# Altium PCB FPGA_Board.PcbDoc (part 3 of 10)
Units mm, origin at the board's own origin, x right, y up, seen from the top; angles counter-clockwise.
Board outline 103.63 x 86.08 mm, 2 copper layers (Top Layer, Bottom Layer); 109 components, 200 nets, 667 pads, 237 vias.
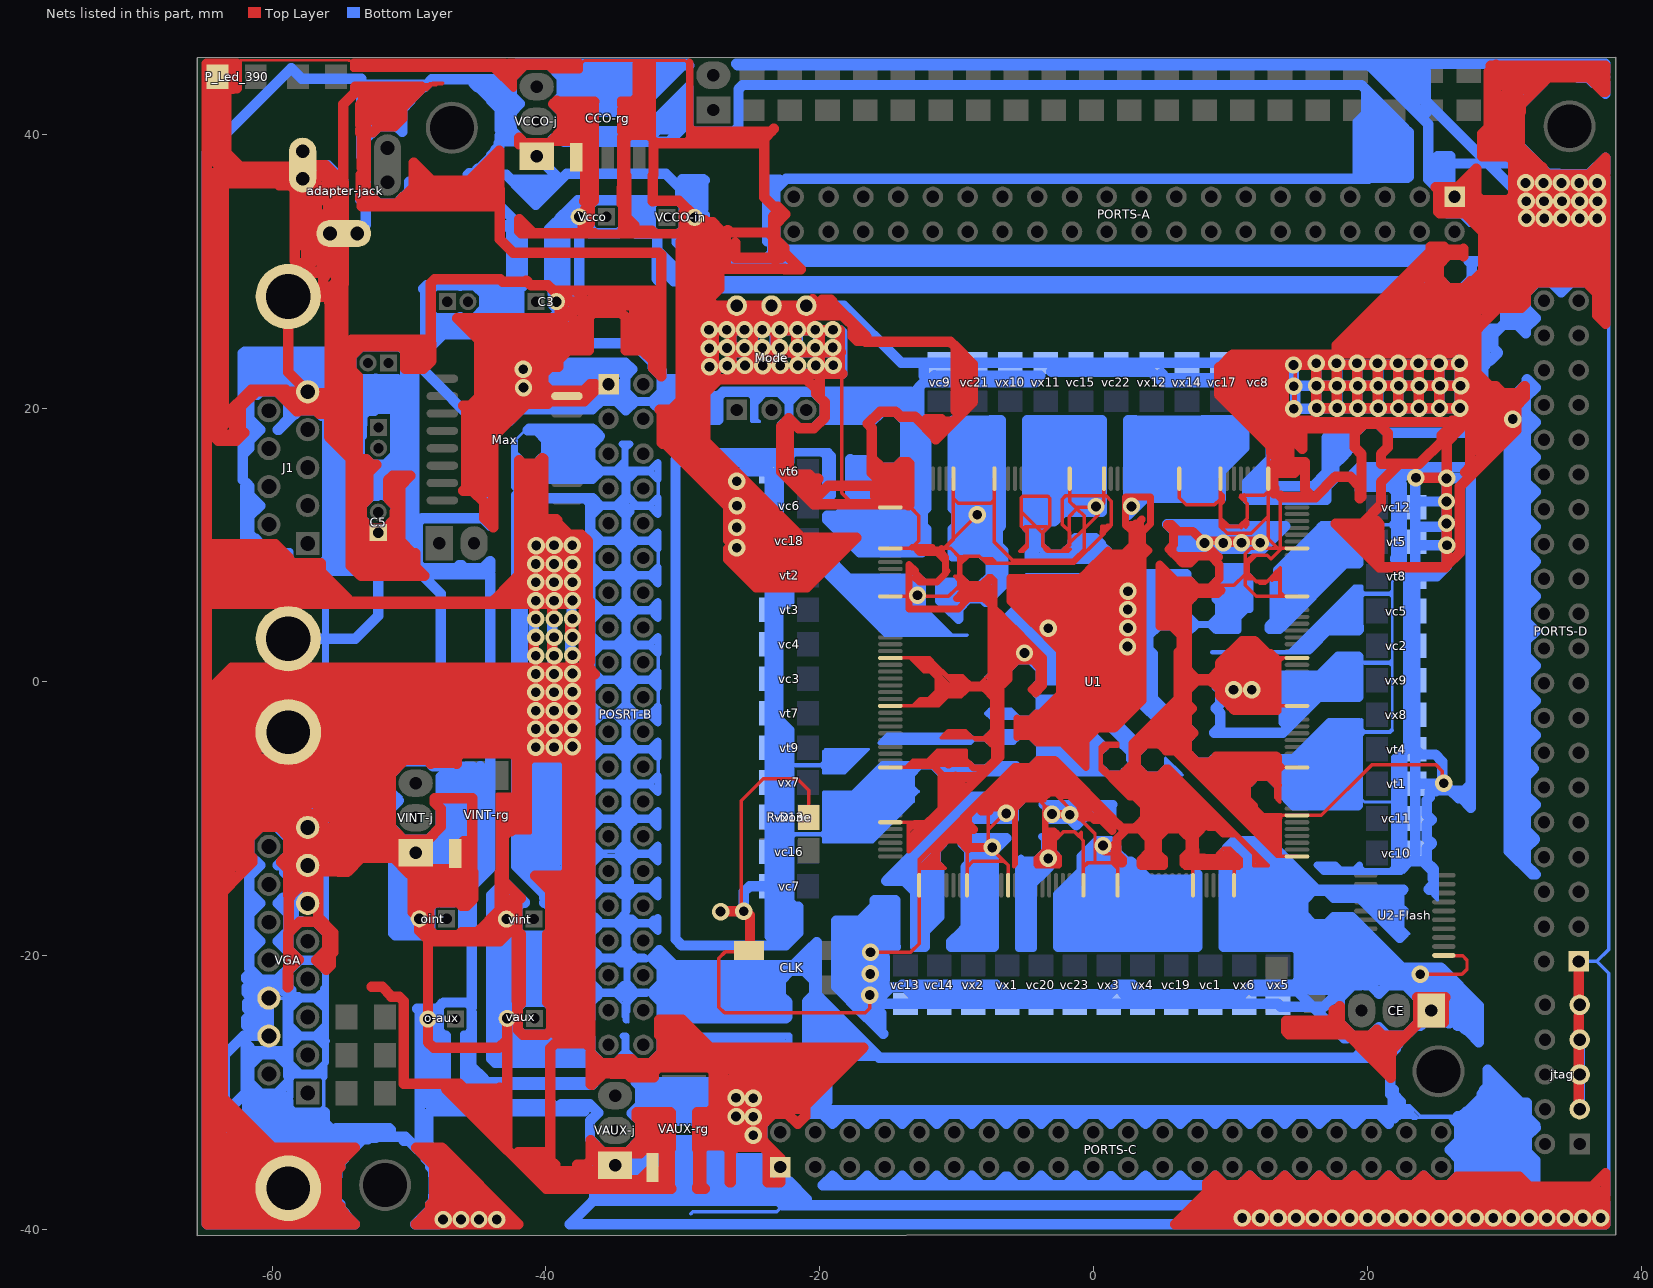
[diagram p3: the nets of this part, all layers, seen from the top]

## Via types
v1: diameter 1.27, hole 0.711, Top Layer to Bottom Layer, 237 vias

## Nets (pads, with @x,y where several pads share a name; then routed paths per layer and width w, separated by ;. In a path a pad name is that pad's centre, name@x,y a point inside that pad or via, vN(x,y) a via of type N, cw(c..) or ccw(c..) an arc to the next point about the centre after c; other vN are vias at no path point) (continued)
GND: (continued)
  Top Layer w0.635: -10.4,-0.85 -9.944,-0.394 -9.781,-0.394 ; -10.075,-0.1 -9.781,-0.394 ; -9.269,-0.1 -8.975,-0.394 ; -9.189,-12.211 -9.189,-11.958 ; -7.656,-4.235 -7.69,-4.2 -7.69,-4.025 -7.269,-3.604 -7.269,-2.644 ; -7.639,-9.439 -8.212,-9.439 -7.931,-9.158 ; -7.479,-4.412 -7.175,-4.716 -7.169,-4.721 ; v1(-7.414,-12.088) -7.562,-12.088 -9.059,-12.088 -9.189,-11.958 ; -7.175,-5.8 -7.169,-5.794 -7.169,-5.792 -7.169,-4.721 ; v1@-6.248,-9.133 -6.273,-9.158 -6.437,-9.158 -6.708,-9.158 -6.775,-9.158 -7.358,-9.158 -7.931,-9.158 ; v1@-5.868,-9.259 -5.645,-9.036 -5.54,-8.931 ; -5.868,-8.687 -6.074,-8.893 -6.112,-8.931 ; -5.868,-8.401 -5.887,-8.382 -5.991,-8.382 -6.041,-8.382 -6.582,-8.382 -7.155,-8.382 ; -5.088,-8.494 -5.104,-8.494 -5.114,-8.505 -5.54,-8.931 ; v1(-3.042,-9.656) -1.344,-9.656 -1.139,-9.656 -0.925,-9.87 ; 1.37,-9.98 1.37,-10.879 0.537,-10.046 ; 1.719,-11.568 1.719,-12.577 ; 3.846,-10.7 3.846,-10.796 4.031,-10.981 ; 5.813,-6.729 5.432,-6.348 5.287,-6.348 4.779,-6.856 ; 6.112,-1.218 6.145,-1.251 ; 6.475,-3.546 5.663,-4.359 ; 6.475,-3.032 4.963,-4.544 4.779,-4.544 ; 6.475,-0.625 6.475,-0.429 6.145,-0.099 ; 6.84,6.165 7.256,6.165 ; 6.869,-0.231 6.869,-0.621 ; 7.039,-11.563 7.039,-11.479 ; 7.038,7.377 5.982,7.377 ; 7.082,-5.367 6.869,-5.154 6.869,-4.884 6.869,-4.47 ; 7.426,-11.19 7.462,-11.153 7.56,-11.056 8.213,-10.403 ; 7.462,-10.403 8.076,-10.403 ; 7.462,-10.223 7.886,-10.223 8.474,-9.635 ; 7.629,-5.831 8.016,-5.831 ; 8.615,-0.056 8.504,0.056 7.546,0.056 7.417,-0.074 6.869,-0.621 ; 8.694,-5.64 8.504,-5.831 ; 8.937,-5.398 13.345,-5.398 13.432,-5.485 ; 9.113,9.126 v1@7.923,10.316 ; 9.181,-1.015 9.956,-1.79 ; 9.181,-0.826 9.181,-0.658 9.181,-0.427 9.006,-0.252 ; v1(9.463,10.147) 9.486,10.17 v1(10.801,10.17) ; 9.676,0.075 v1@9.676,-0.252 ; 10.136,-11.052 10.014,-10.93 9.892,-10.808 ; 10.268,-2.102 9.956,-1.79 ; v1(11.55,-0.581) 11.653,-0.684 11.653,-1.34 ; 11.75,-10.218 12.163,-10.218 13.2,-11.255 13.432,-11.487 ; v1(12.161,10.17) 12.015,10.316 v1@7.923,10.316 ; 12.333,-6.92 12.804,-6.92 13.068,-7.184 ; 13.2,1.3 11.94,2.56 10.983,2.56 9.599,1.176 9.621,1.176 9.896,0.901 ; 13.426,-7.541 13.421,-7.536 ; 13.432,-7.548 13.421,-7.536 ; 13.485,-9.898 13.432,-9.951 13.432,-11.487 ; 13.617,-6.213 13.58,-6.25 ; -10.149,-10.998 -9.279,-10.998 ; -10.149,-10.998 -10.473,-10.998 -10.259,-10.784 -9.189,-10.784 ; -10.149,-10.998 -9.736,-11.411 ; -9.781,-0.394 -8.975,-0.394 ; -9.736,-11.411 -9.692,-11.411 -9.279,-10.998 ; -9.736,-11.411 -10.903,-11.411 -10.895,-11.419 -9.728,-11.419 ; -9.736,-11.411 -9.728,-11.419 ; -9.728,-11.419 -9.189,-11.419 ; -9.728,-11.419 -9.189,-11.958 ; -9.279,-10.998 -9.189,-10.908 ; -9.189,-11.958 -9.189,-11.419 ; -9.189,-11.419 -9.189,-10.908 ; -9.189,-10.908 -9.189,-10.784 ; -9.189,-10.784 -8.765,-10.784 -9.189,-10.36 ; -9.189,-10.784 -9.189,-10.36 ; -9.189,-10.36 -9.238,-10.311 -9.824,-10.311 -9.251,-9.739 -9.189,-9.739 ; -9.189,-10.36 -9.189,-9.739 ; -9.189,-9.739 -8.057,-8.607 ; -8.975,-0.394 -8.021,-0.394 -7.966,-0.449 -7.269,-1.146 ; -8.057,-8.607 -8.057,-8.545 -7.662,-8.15 -5.743,-6.231 -4.571,-6.231 ; -8.057,-8.607 -7.832,-8.382 ; -7.931,-9.158 -7.704,-8.931 ; -7.832,-8.382 -7.155,-8.382 ; -7.832,-8.382 -7.6,-8.15 -5.753,-6.303 -4.644,-6.303 ; -7.704,-8.931 -7.131,-8.931 -6.708,-8.931 -6.437,-8.931 -6.248,-8.931 -6.112,-8.931 ; -7.704,-8.931 -7.155,-8.382 ; -7.269,-2.644 -7.269,-1.146 ; -7.269,-2.644 -7.175,-2.55 -7.169,-2.544 ; -7.269,-1.146 -7.175,-1.241 -7.169,-1.246 -7.169,-2.544 ; -7.169,-4.721 -7.169,-2.544 ; -6.112,-8.931 -6.074,-8.931 -5.868,-8.931 -5.645,-8.931 -5.54,-8.931 ; -4.644,-6.303 -4.571,-6.231 ; -4.644,-6.303 -2.263,-6.303 ; -4.571,-6.231 -4.063,-5.723 -2.843,-5.723 -2.263,-6.303 ; -2.899,-7.487 -2.318,-8.068 ; -2.899,-7.487 -2.899,-7.999 -3.192,-7.706 -6.189,-7.706 -5.619,-7.136 -3.25,-7.136 -2.899,-7.487 ; -2.899,-7.487 -2.899,-7.107 ; -2.899,-7.107 -3.338,-6.668 -5.707,-6.668 -6.935,-7.896 -6.763,-8.068 -2.318,-8.068 ; -2.899,-7.107 -1.938,-8.068 ; -2.899,-7.107 -2.899,-6.697 -2.724,-6.522 -1.178,-8.068 -1.938,-8.068 ; -2.318,-8.068 -1.938,-8.068 ; -2.318,-8.068 -2.168,-8.218 -1.788,-8.218 ; -2.263,-6.303 1.369,-9.935 1.369,-9.979 ; -1.938,-8.068 -1.788,-8.218 ; -1.788,-8.218 -0.925,-9.081 ; -1.788,-8.218 -0.391,-8.218 1.369,-9.979 ; -0.925,-9.87 -0.925,-9.081 ; -0.925,-9.87 -0.136,-9.87 ; -0.925,-9.081 -0.925,-8.803 -0.618,-8.496 0.932,-10.046 0.537,-10.046 ; -0.925,-9.081 -0.136,-9.87 ; -0.136,-9.87 0.04,-10.046 0.537,-10.046 ; -0.136,-9.87 0.361,-9.87 0.537,-10.046 ; 1.369,-9.979 2.046,-10.656 3.004,-10.656 ; 1.692,-12.55 1.719,-12.577 ; 1.692,-12.55 1.692,-13.235 2.089,-13.235 2.105,-13.219 ; 1.692,-12.55 1.692,-11.474 2.396,-10.769 3.117,-10.769 ; 1.719,-12.577 2.105,-12.963 2.105,-13.219 ; 1.719,-12.577 1.719,-12.833 2.105,-13.219 ; 1.861,-6.898 1.814,-6.945 1.837,-6.945 3.236,-8.344 ; 1.861,-6.898 1.911,-6.898 2.004,-6.806 ; 1.861,-6.898 1.326,-6.898 1.326,-7.01 2.66,-8.344 3.004,-8.344 ; 1.861,-6.898 1.953,-6.806 2.004,-6.806 ; 2.004,-6.806 2.675,-6.134 2.866,-5.944 2.866,-4.93 3.075,-5.139 ; 3.004,-10.656 3.048,-10.7 3.117,-10.769 ; 3.004,-10.656 3.321,-10.338 ; 3.004,-8.344 3.698,-9.038 ; 3.004,-8.344 3.236,-8.344 ; 3.075,-6.771 3.516,-6.771 ; 3.075,-6.771 2.871,-6.771 2.204,-6.771 3.698,-8.265 3.698,-8.806 ; 3.075,-6.771 3.075,-6.975 3.198,-7.098 3.198,-7.151 4.334,-8.287 ; 3.075,-6.771 3.075,-5.139 ; 3.075,-5.139 3.075,-4.604 6.145,-1.534 ; 3.075,-5.139 3.144,-5.209 ; 3.075,-5.139 3.394,-4.821 ; 3.117,-10.769 3.354,-10.769 3.923,-11.339 4.031,-11.339 ; 3.144,-6.179 3.144,-6.399 3.516,-6.771 ; 3.144,-6.179 3.144,-5.209 ; 3.144,-6.179 3.737,-6.771 ; 3.144,-5.209 3.157,-5.209 3.545,-4.821 ; 3.236,-8.344 3.698,-8.806 ; 3.321,-10.338 4.746,-10.338 ; 3.321,-10.338 3.698,-9.962 ; 3.394,-4.821 3.545,-4.821 ; 3.394,-4.821 3.67,-4.544 ; 3.394,-4.821 3.312,-4.821 3.589,-4.544 3.67,-4.544 ; 3.516,-6.771 3.516,-6.975 3.516,-7.161 5.889,-9.534 ; 3.516,-6.771 3.737,-6.771 ; 3.545,-4.821 3.821,-4.544 ; 3.67,-4.544 3.821,-4.544 ; 3.698,-9.962 3.698,-9.038 ; 3.698,-9.962 3.745,-9.914 6.269,-9.914 5.889,-9.534 ; 3.698,-9.038 3.698,-8.806 ; 3.737,-6.771 3.821,-6.856 ; 3.821,-6.856 3.941,-6.975 6.302,-9.336 6.313,-9.336 ; 3.821,-6.856 4.146,-6.856 ; 3.821,-4.544 3.907,-4.544 ; 3.854,-13.429 3.47,-13.429 3.433,-13.392 3.433,-13.001 4.031,-12.404 ; 3.854,-13.429 4.548,-13.429 ; 3.854,-13.429 4.031,-13.253 4.031,-12.404 ; 3.907,-4.544 4.238,-4.544 ; 3.907,-4.544 6.145,-2.306 ; 3.973,-9.534 3.973,-8.647 ; 3.973,-9.534 5.889,-9.534 ; 3.973,-9.534 4.295,-9.212 4.538,-9.212 ; 3.973,-8.647 4.538,-9.212 ; 3.973,-8.647 4.334,-8.287 ; 4.031,-12.404 4.031,-11.339 ; 4.031,-11.339 4.031,-10.981 ; 4.031,-11.339 4.21,-11.16 ; 4.031,-10.981 4.21,-11.16 ; 4.146,-6.856 4.265,-6.975 6.313,-9.023 ; 4.146,-6.856 4.779,-6.856 ; 4.21,-11.16 4.548,-11.498 4.548,-13.429 ; 4.21,-11.16 4.669,-10.7 ; 4.238,-4.544 4.779,-4.544 ; 4.238,-4.544 6.145,-2.637 6.145,-2.306 ; 4.334,-8.287 5.259,-9.212 4.538,-9.212 ; 4.548,-13.429 5.105,-13.429 5.105,-12.93 4.669,-12.494 4.669,-11.421 ; 4.669,-11.421 4.669,-10.7 ; 4.669,-11.421 5.346,-10.744 6.219,-10.744 6.304,-10.744 6.605,-11.046 7.039,-11.479 ; 4.669,-10.7 4.669,-10.415 4.746,-10.338 ; 4.746,-10.338 6.313,-10.338 6.313,-9.336 ; 4.779,-6.856 5.695,-6.856 ; 4.779,-4.544 4.846,-4.612 ; 4.823,7.867 4.823,4.056 5.229,4.056 ; 4.823,7.867 5.538,7.152 5.538,7.139 ; 4.823,7.867 4.823,8.536 5.688,7.671 5.982,7.377 ; 4.846,-4.612 5.287,-5.052 ; 4.846,-4.612 5.409,-4.612 5.663,-4.359 ; 5.229,4.056 5.704,4.056 ; 5.229,4.056 5.229,7.408 5.249,7.428 5.538,7.139 ; 5.287,-5.052 5.968,-5.052 ; 5.287,-5.052 5.663,-4.677 5.663,-4.359 ; 5.538,7.139 5.538,4.832 5.798,4.572 5.798,6.32 6.157,6.679 5.998,6.679 5.538,7.139 ; 5.695,-6.856 5.355,-7.196 7.751,-9.591 7.942,-9.591 ; 5.695,-6.856 5.94,-6.856 8.309,-9.225 ; 5.695,-6.856 5.695,-7.344 7.942,-9.591 ; 5.695,-6.856 8.187,-9.347 ; 5.704,4.056 6.381,3.379 ; 5.704,4.056 6.098,4.056 6.381,3.773 ; 5.75,9.441 5.75,9.457 ; 5.75,9.441 6.01,9.181 ; 5.75,9.441 5.5,9.691 5.75,9.94 ; 5.75,9.457 5.75,9.94 ; 5.75,9.457 6.026,9.181 ; 5.75,9.94 5.831,10.021 5.831,10.979 5.381,11.429 5.381,11.507 5.681,11.507 6.189,10.999 7.24,10.999 v1@7.923,10.316 ; 5.968,-5.052 6.287,-5.052 ; 5.968,-5.052 13.2,-12.284 13.432,-12.516 13.432,-11.487 ; 5.982,7.377 6.295,7.064 7.193,7.064 ; 6.01,9.181 6.518,8.673 7.038,8.673 7.546,9.181 ; 6.01,9.181 6.026,9.181 ; 6.026,9.181 7.546,9.181 ; 6.145,-2.306 6.145,-1.534 ; 6.145,-1.534 6.145,-1.251 ; 6.145,-1.251 6.145,-1.218 6.145,-0.955 6.145,-0.099 ; 6.145,-0.099 6.381,0.137 ; 6.145,-0.099 6.145,2.186 6.381,2.421 ; 6.287,-5.052 6.287,-4.492 6.475,-4.304 6.869,-3.91 ; 6.287,-5.052 6.52,-4.82 6.564,-4.775 6.869,-4.47 ; 6.287,-5.052 7.992,-6.757 7.992,-6.811 8.076,-6.895 10.445,-6.895 11.35,-6.895 11.782,-6.895 12.916,-6.895 12.935,-6.895 13.146,-6.684 13.206,-6.624 ; 6.313,-9.336 6.313,-9.023 ; 6.313,-9.023 6.558,-9.023 6.619,-9.084 7.039,-9.503 7.039,-9.84 ; 6.381,0.137 6.541,0.297 6.953,0.297 7.193,0.297 6.869,0.621 ; 6.381,0.137 6.381,2.421 ; 6.381,2.421 6.381,3.379 ; 6.381,3.379 6.381,3.773 ; 6.381,3.773 6.381,6.252 7.193,7.064 ; 6.869,-4.47 6.869,-4.196 ; 6.869,-4.196 6.869,-3.91 ; 6.869,-4.196 7.341,-3.725 6.869,-3.254 ; 6.869,-3.91 6.869,-3.254 ; 6.869,-3.254 6.869,-2.296 ; 6.869,-2.296 6.869,-1.579 ; 6.869,-2.296 7.228,-1.938 6.869,-1.579 ; 6.869,-1.579 6.869,-0.621 ; 6.869,0.621 7.17,0.621 ; 6.869,0.621 6.869,0.921 ; 6.869,0.921 6.869,5.779 7.256,6.165 ; 6.869,0.921 7.17,0.621 ; 7.039,-11.479 7.039,-9.84 ; 7.039,-9.84 7.462,-9.84 7.694,-9.84 7.942,-9.591 ; 7.17,0.621 7.546,0.244 8.504,0.244 9.181,0.921 9.181,1.39 10.835,3.044 11.765,3.044 12.707,2.102 12.924,2.102 13.367,1.659 13.367,1.467 13.367,-1.483 13.35,-1.5 13.06,-1.79 ; 7.193,7.064 7.352,7.064 7.545,6.87 7.546,6.869 8.036,6.869 8.204,6.701 8.618,6.701 ; 7.256,6.165 7.546,6.456 9.068,6.456 9.313,6.701 8.618,6.701 ; 7.546,9.181 8.564,9.181 9.181,8.564 9.181,7.546 8.684,7.05 8.618,6.984 8.618,6.701 ; 7.942,-9.591 8.187,-9.347 ; 8.016,-5.831 8.735,-6.55 8.809,-6.624 11.476,-6.624 13.206,-6.624 ; 8.016,-5.831 8.504,-5.831 ; 8.187,-9.347 8.474,-9.635 ; 8.187,-9.347 8.309,-9.225 ; 8.309,-9.225 8.597,-9.512 ; 8.474,-9.635 8.597,-9.512 ; 8.474,-9.635 8.748,-9.908 ; 8.504,-5.831 8.775,-6.102 13.019,-6.102 ; 8.504,-5.831 12.747,-5.831 ; 8.597,-9.512 8.805,-9.721 ; 8.748,-9.908 9.409,-10.569 ; 8.748,-9.908 8.253,-10.403 8.419,-10.569 9.004,-10.569 ; 8.748,-9.908 8.805,-9.851 8.805,-9.721 ; 8.805,-9.721 9.653,-10.569 ; 9.004,-10.569 9.487,-11.052 9.892,-11.052 ; 9.004,-10.569 9.409,-10.569 ; 9.006,-0.252 8.918,-0.164 8.918,-0.077 9.07,0.075 9.896,0.901 ; 9.006,-0.252 v1@9.676,-0.252 ; 9.409,-10.569 9.892,-11.052 ; 9.409,-10.569 9.653,-10.569 ; 9.653,-10.569 9.892,-10.808 ; v1@9.676,-0.252 9.676,-0.779 10.237,-1.34 11.653,-1.34 ; v1@9.676,-0.252 v1@10.105,-0.252 ; 9.892,-11.052 9.892,-10.808 ; 9.896,0.901 9.896,0.968 10.994,2.066 11.291,2.066 ; 9.956,-1.79 10.313,-1.79 12.093,-1.79 ; v1@10.105,-0.252 v1@10.5,-0.252 ; v1@10.105,-0.252 10.105,-0.736 v1@11.049,-0.736 ; v1@10.105,-0.252 10.105,0.075 10.105,0.506 10.72,1.121 10.72,0.253 10.819,0.155 ; v1@10.5,-0.252 10.456,-0.208 10.739,0.075 10.819,0.155 ; v1@10.5,-0.252 v1@11.225,-0.252 ; 10.819,0.155 11.263,0.599 11.373,0.599 ; 10.819,0.155 10.881,0.092 10.898,0.075 v1@11.225,-0.252 ; v1@11.049,-0.736 11.653,-1.34 ; v1@11.049,-0.736 11.049,-0.428 v1@11.225,-0.252 ; 11.291,2.066 11.829,2.066 12.898,0.998 13.06,0.835 13.06,-1.79 ; 11.291,2.066 12.629,0.729 12.664,0.693 12.664,-1.79 ; 11.373,0.599 11.675,0.297 11.675,0.075 11.675,-1.318 11.653,-1.34 ; 11.373,0.599 11.093,0.879 11.093,1.637 12.093,0.637 12.093,0.193 12.093,-1.79 ; 12.093,-1.79 12.664,-1.79 ; 12.664,-1.79 13.06,-1.79 ; 12.747,-5.831 13.019,-6.102 ; 12.747,-5.831 13.087,-5.831 13.432,-5.485 ; 13.019,-6.102 13.432,-6.102 ; 13.068,-7.184 13.07,-7.185 ; 13.068,-7.184 13.07,-7.185 ; 13.07,-7.185 13.206,-7.321 ; 13.206,-7.321 13.421,-7.536 ; 13.206,-7.321 13.421,-7.536 ; 13.206,-7.321 13.206,-7.185 13.206,-7.046 13.206,-6.624 ; 13.206,-6.624 13.58,-6.25 ; 13.432,-6.102 13.58,-6.25 ; 13.432,-6.102 13.432,-5.485